# Altium PCB Dolphin.PcbDoc (part 3 of 3)
Units mil, origin at the board's own origin, x right, y up, seen from the top; angles counter-clockwise.
Board outline 4250 x 2750 mil, 4 copper layers (Top Layer, GND, POWER, Bottom Layer); 213 components, 151 nets, 660 pads, 338 vias.
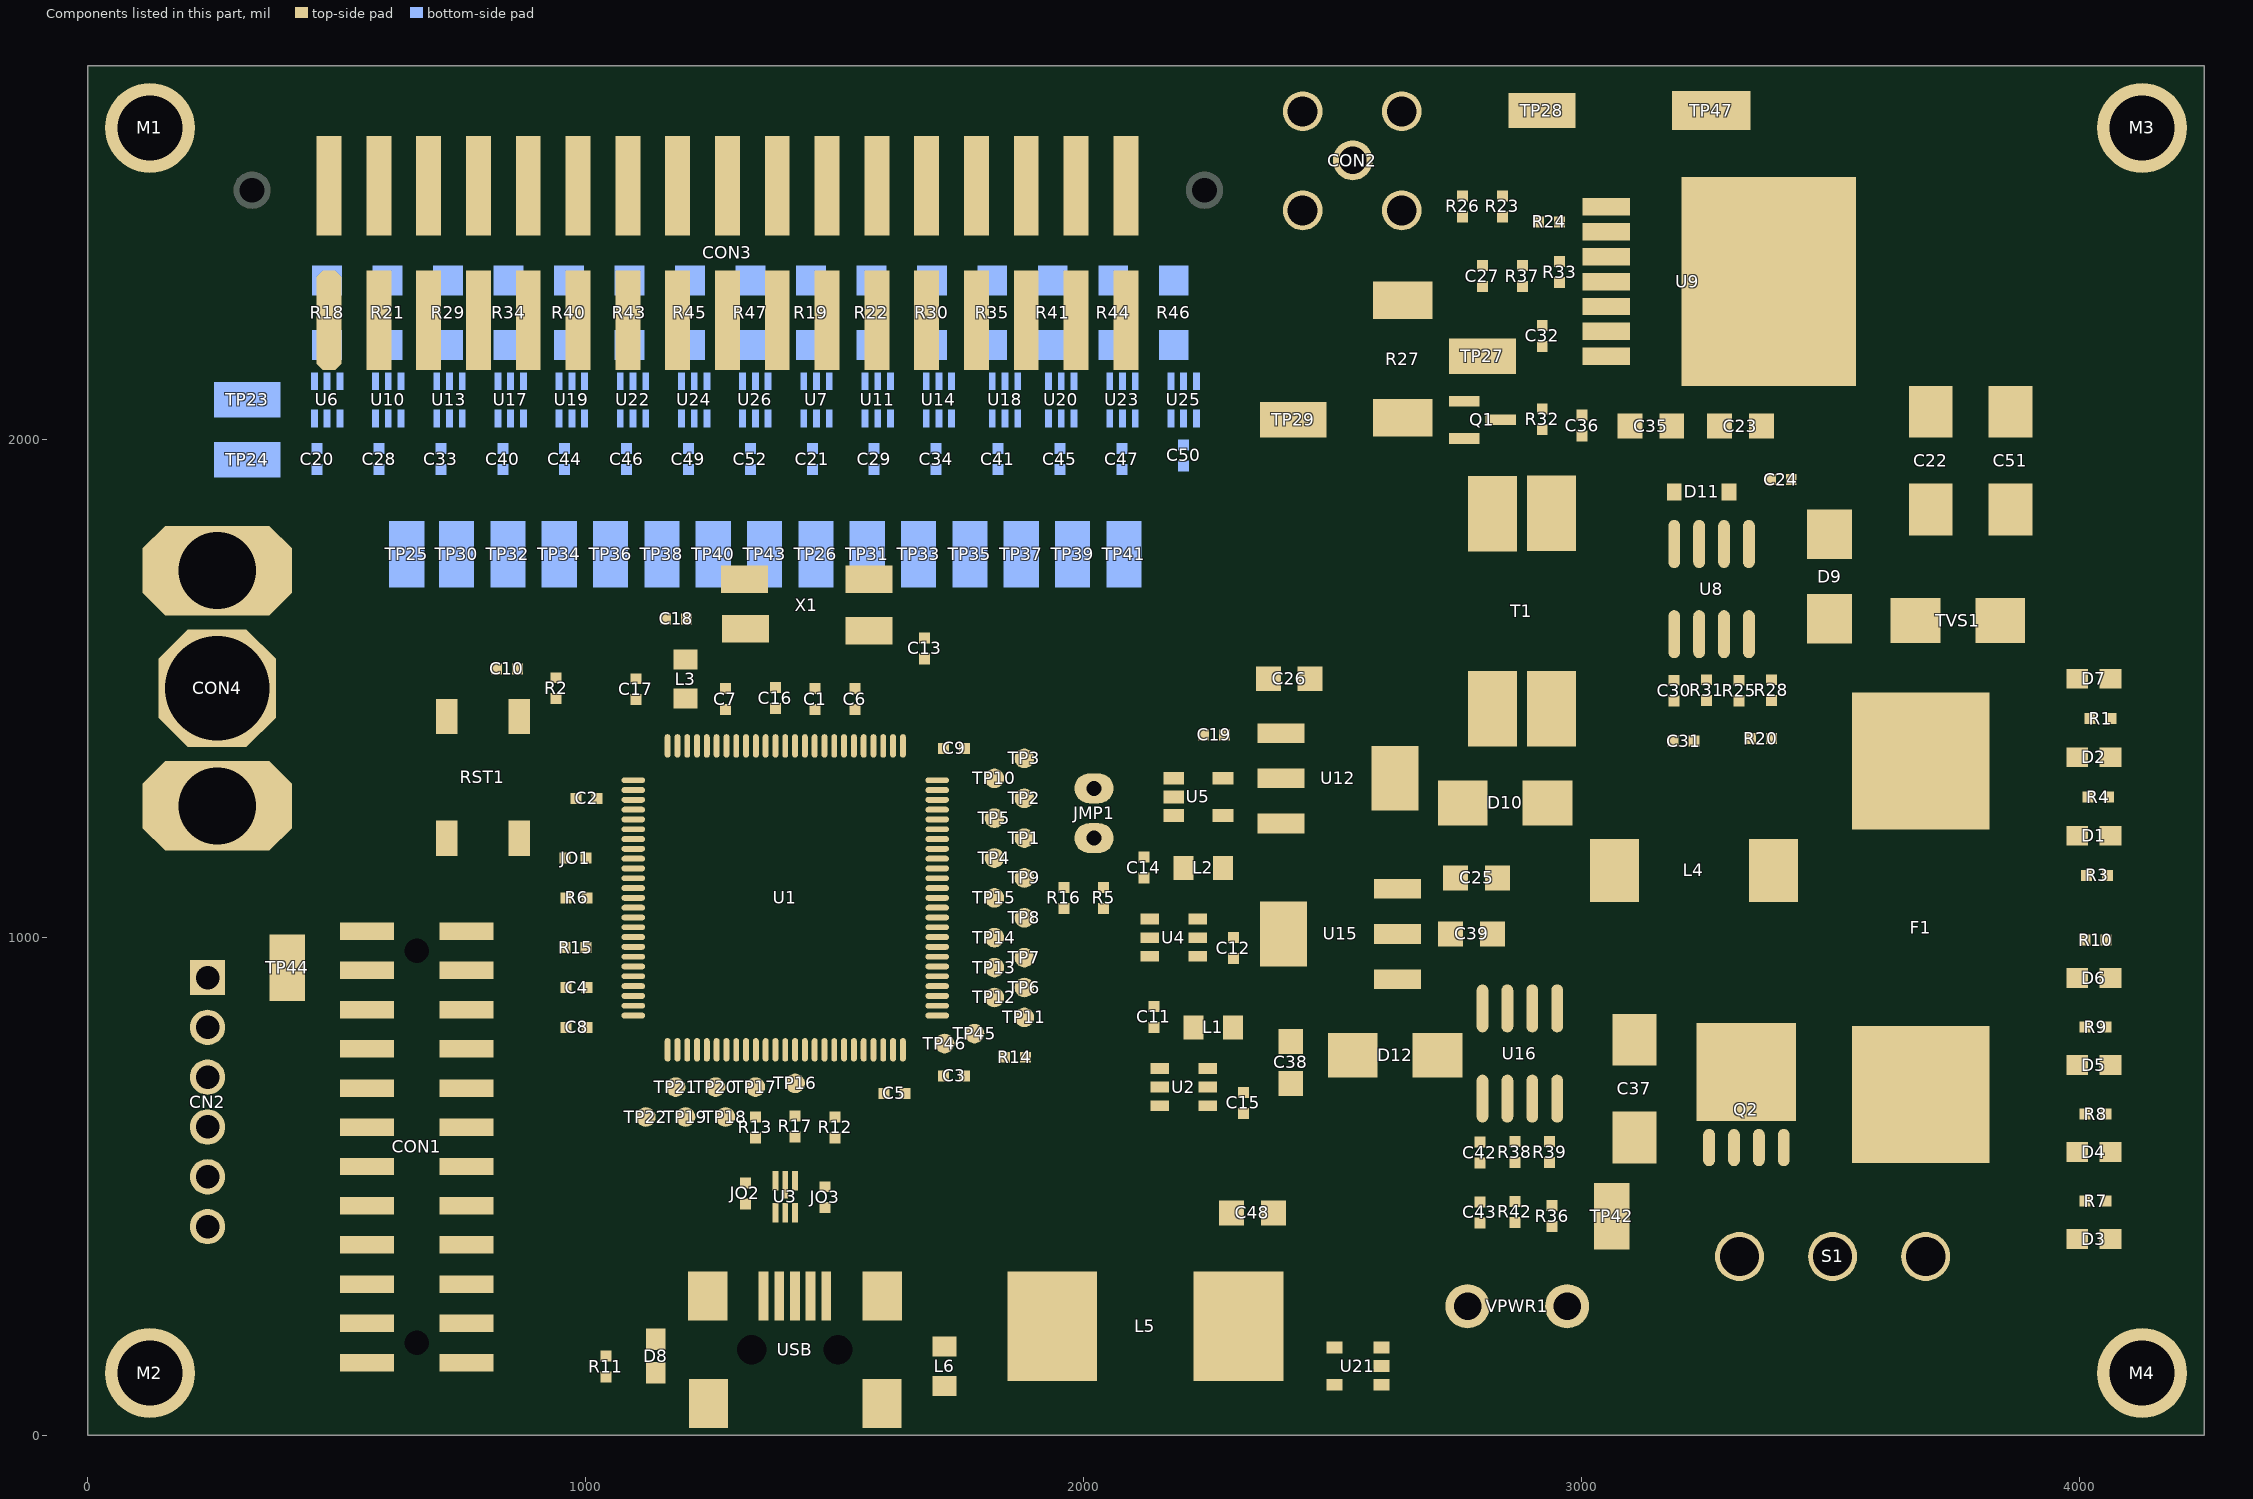
[diagram p5: the components of this part, seen from the top]

## Silkscreen, mask and mechanical layers (free items; w line width, h text height)
Top Overlay:
  drawing of 3025 lines, arcs and shapes, not listed
  text "15x Electroreceptors (Head/Skin)" at 932.5,2682.5 h60
  text "E0" at 462.5,2635 h60
  text "E1" at 560,2632.5 h60
  text "E2" at 655,2632.5 h60
  text "E3" at 757.5,2632.5 h60
  text "E4" at 857.5,2632.5 h60
  text "E5" at 960,2632.5 h60
  text "E6" at 1060,2632.5 h60
  text "E7" at 1160,2632.5 h60
  text "E8" at 1257.5,2630 h60
  text "E9" at 1357.5,2630 h60
  text "E10" at 1447.5,2630 h60
  text "E11" at 1550,2627.5 h60
  text "E12" at 1647.5,2627.5 h60
  text "E13" at 1747.5,2627.5 h60
  text "E14" at 1847.5,2627.5 h60
  text "EOD (TAIL)" at 2422.5,2355 h60
  text "Dolphin" at 642.5,1775 h100
Mechanical 7:
  circle w5: c125,125 r62.5
  circle w5: c4125,2625 r62.5
  circle w5: c125,2625 r62.5
  circle w5: c4125,125 r62.5
  lines w5: 0,0 4250,0 4250,2750 0,2750 0,0

## Dimensions
0,2750 to 4250,2750 on Mechanical 15
0,2750 to 0,0 on Mechanical 15

## Text inside footprints (layer, text, board x,y; h text height)
C22: Top Overlay "+" at 3765.65,1749.04 h45 r90
C37: Top Overlay "+" at 3040.65,904.04 h45 r270
C51: Top Overlay "+" at 3925.65,1749.04 h45 r90
CN2: Top Overlay "VDD" at 315.65,894.04 h30 r90; Top Overlay "JTCK" at 315.65,794.04 h30 r90; Top Overlay "GND" at 315.65,694.04 h30 r90; Top Overlay "JTMS" at 315.65,581.54 h30 r90; Top Overlay "NRST" at 315.65,494.04 h30 r90; Top Overlay "SWO" at 315.65,394.04 h30 r90
D9: Top Overlay "A" at 3555.76,1620.61 h50 r270; Top Overlay "C" at 3555.76,1860.77 h50 r270
D10: Top Overlay "A" at 2742.22,1211.42 h50 r180; Top Overlay "C" at 2982.38,1211.42 h50 r180
D12: Top Overlay "A" at 2521.57,704.88 h50 r180; Top Overlay "C" at 2761.73,704.88 h50 r180
S1: Top Overlay "SWITCH" at 3627.65,244.86 h70 r180
TVS1: Top Overlay "A" at 3859.07,1694.16 h50; Top Overlay "C" at 3618.91,1694.16 h50